# Altium PCB PCB2.PcbDoc
Units mil, origin at the board's own origin, x right, y up, seen from the top; angles counter-clockwise.
Board outline 3188.98 x 3188.98 mil, 2 copper layers (Top Layer, Bottom Layer); 36 components, 23 nets, 149 pads, 22 vias.
Unrouted connection lines stored in the file: 5.
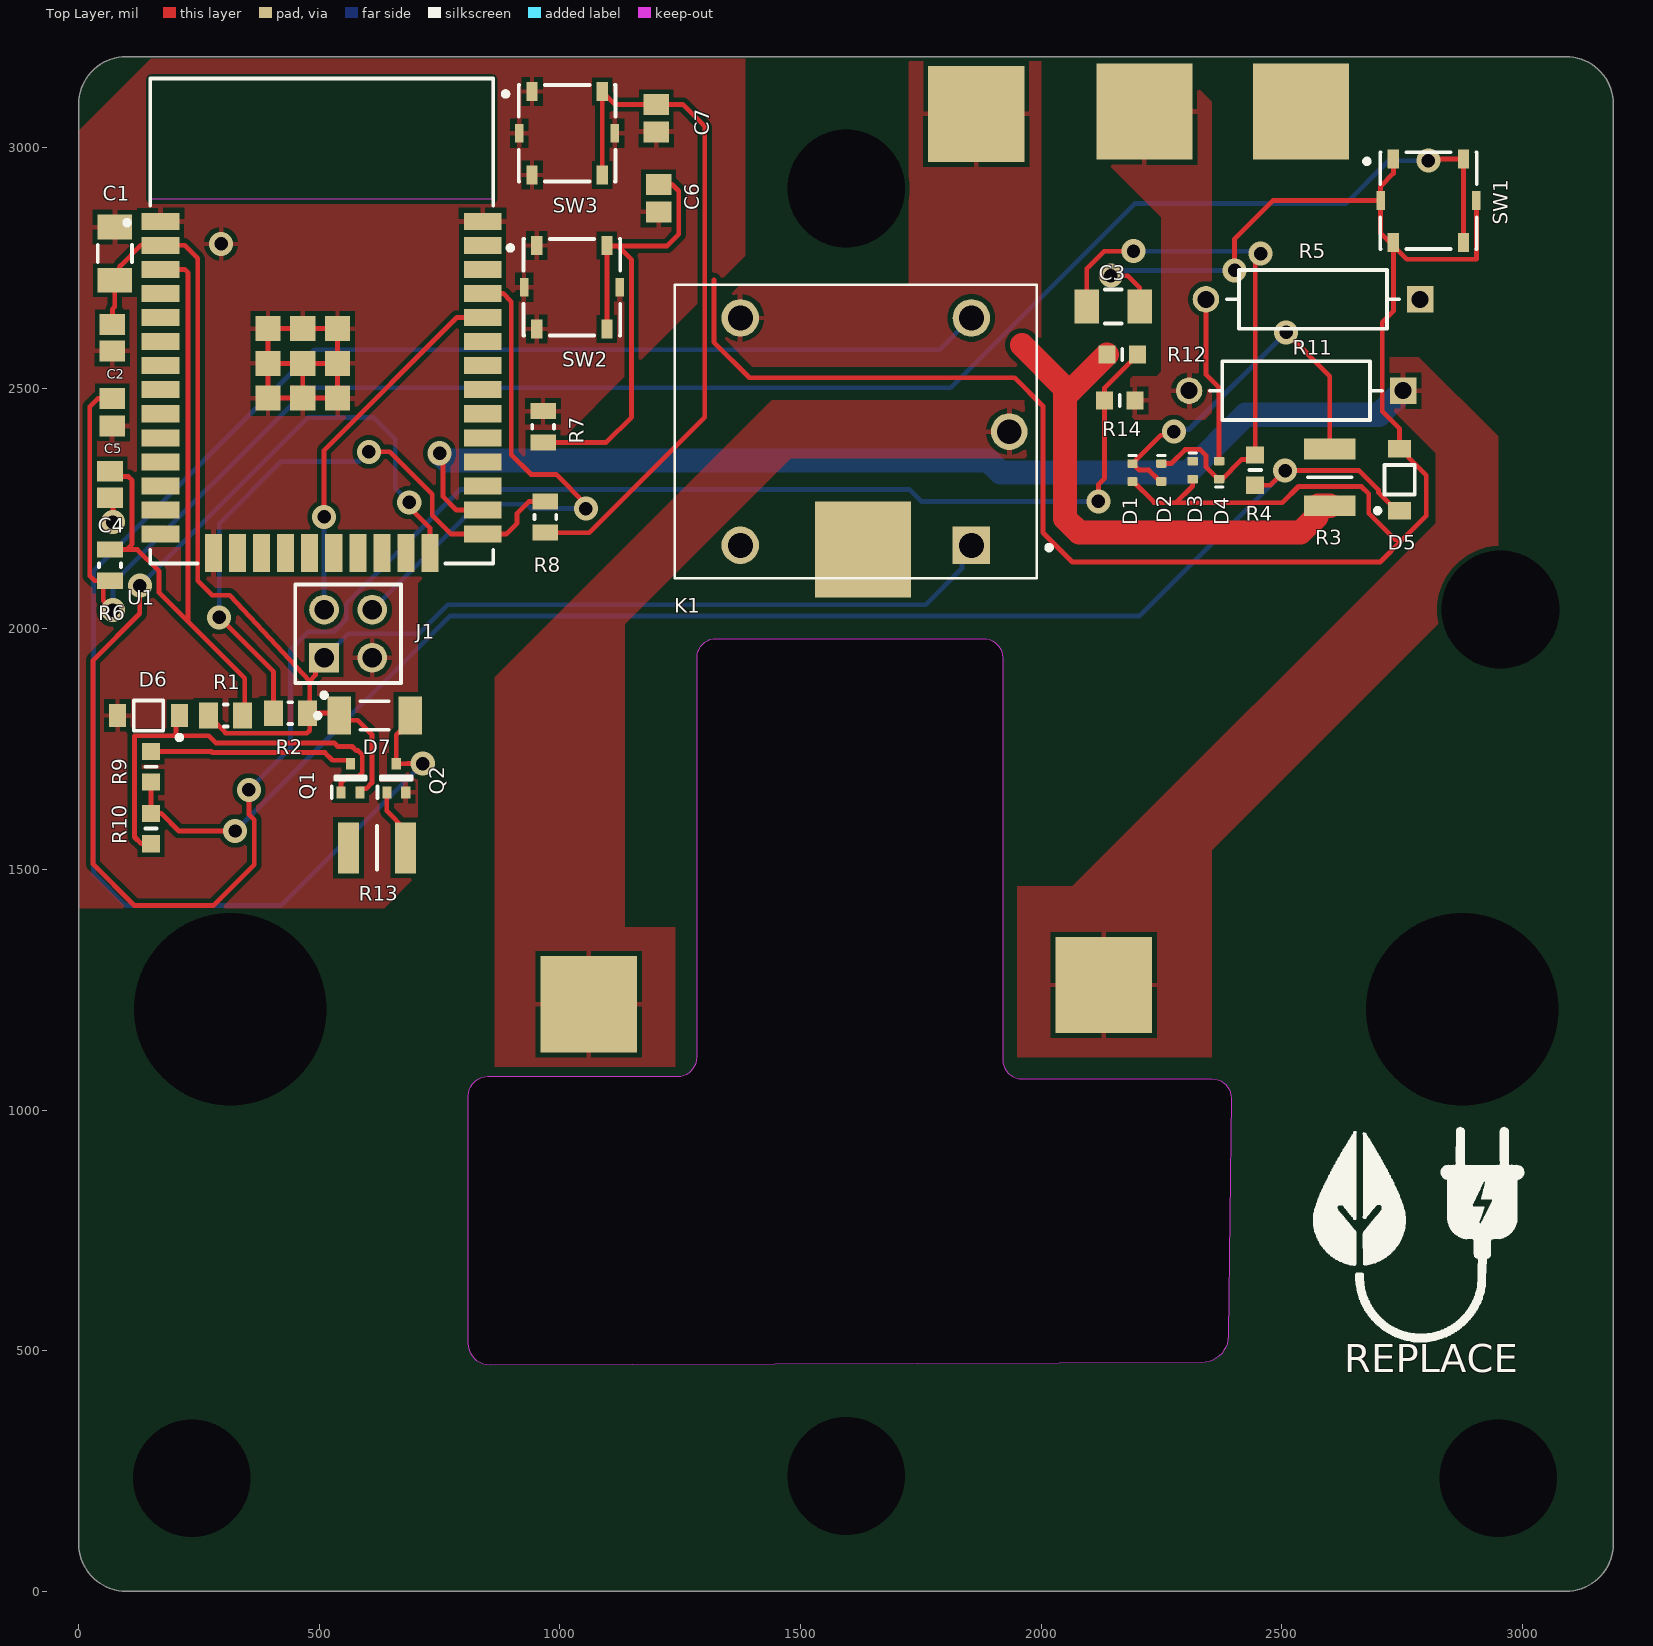
[diagram p0: Top Layer view]
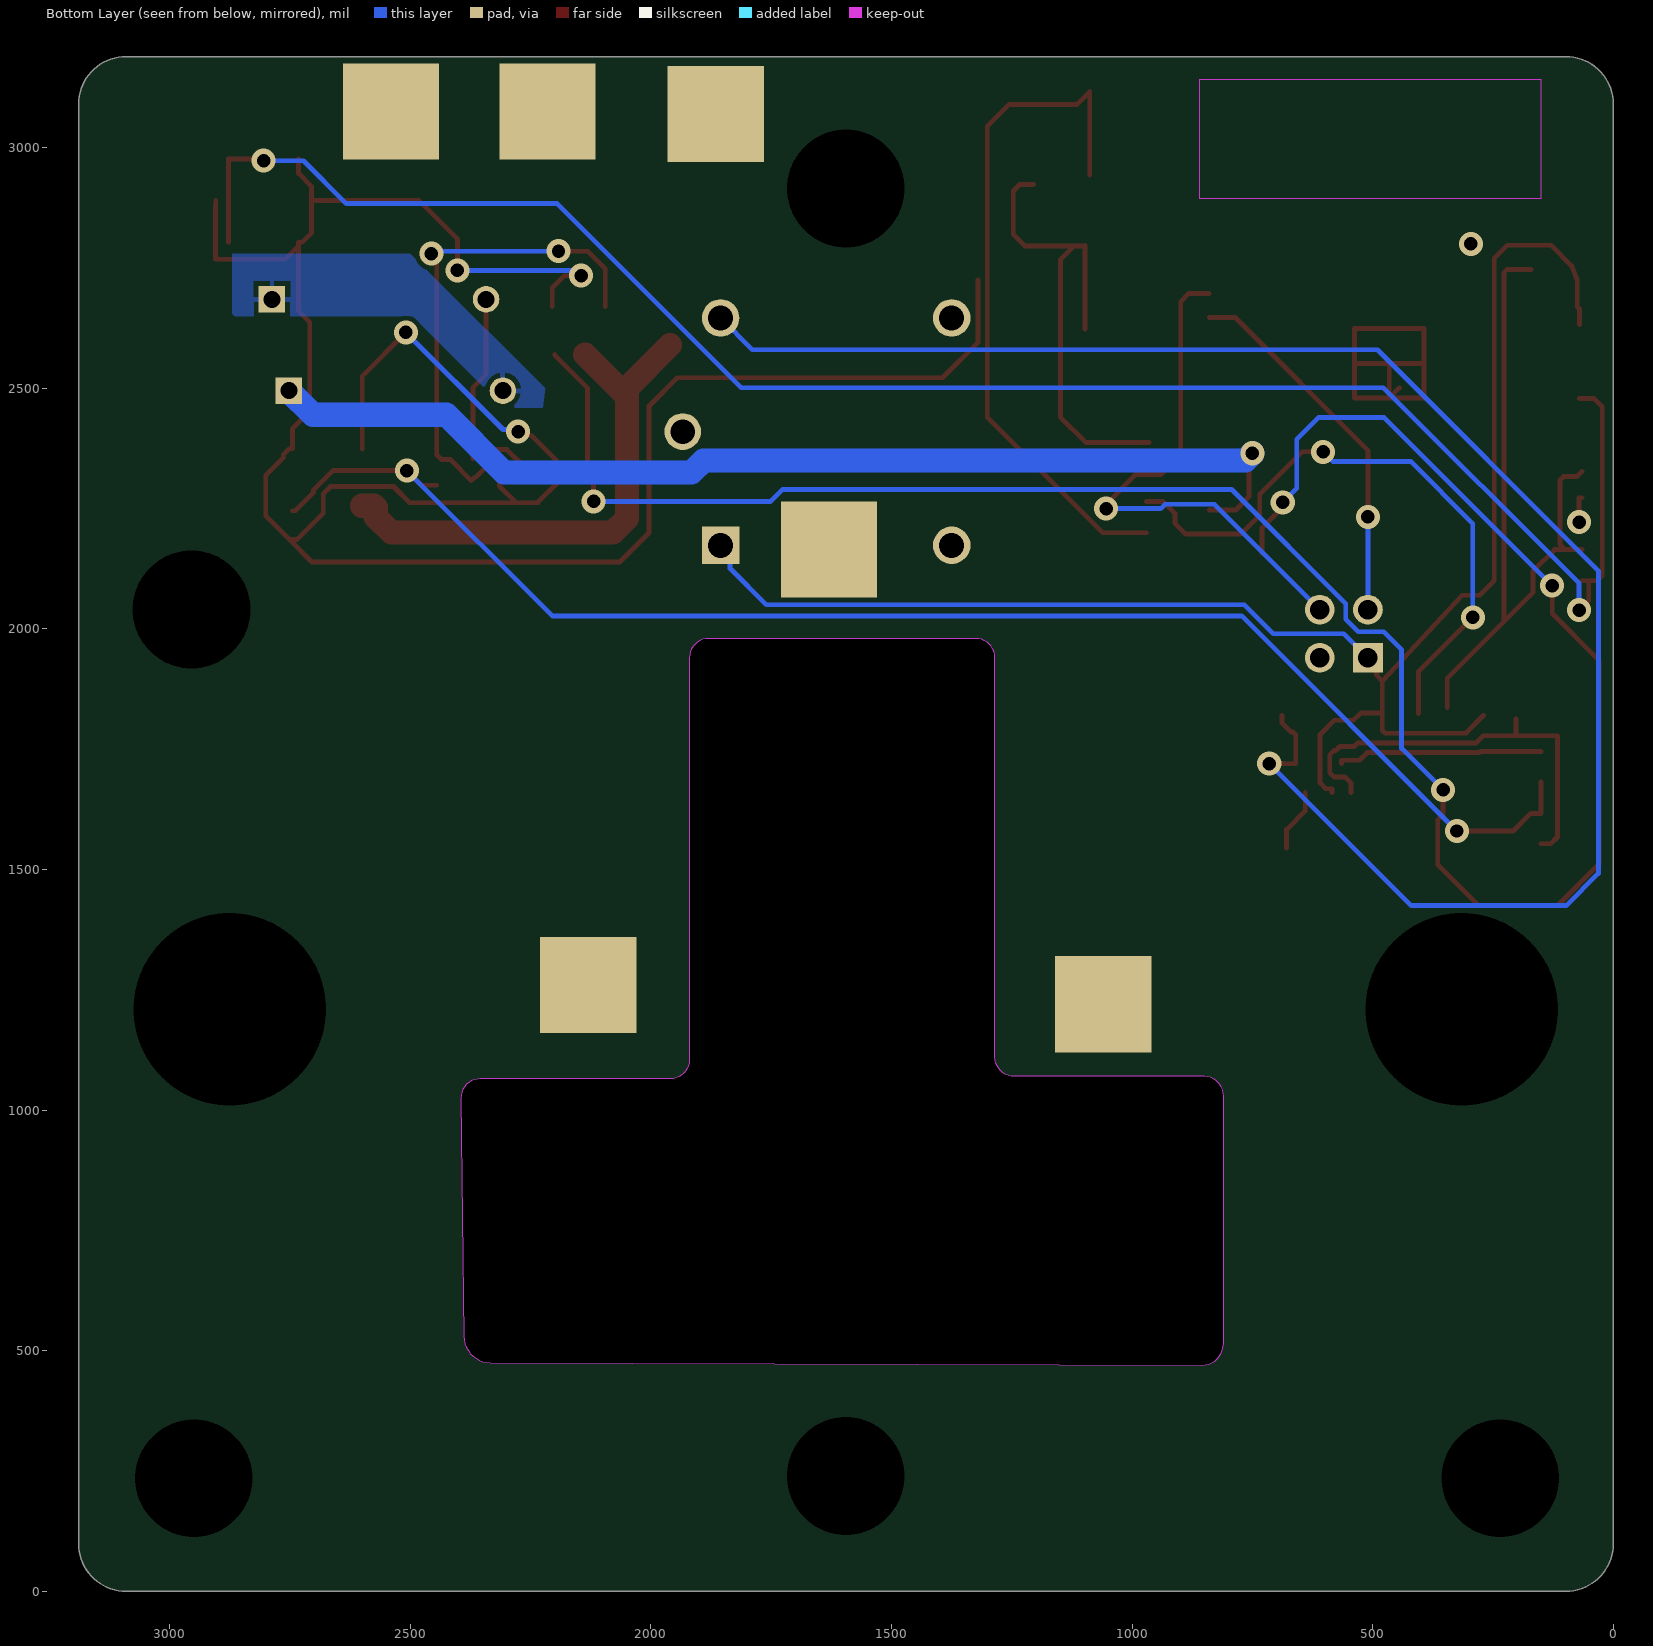
[diagram p1: Bottom Layer view, seen from below]
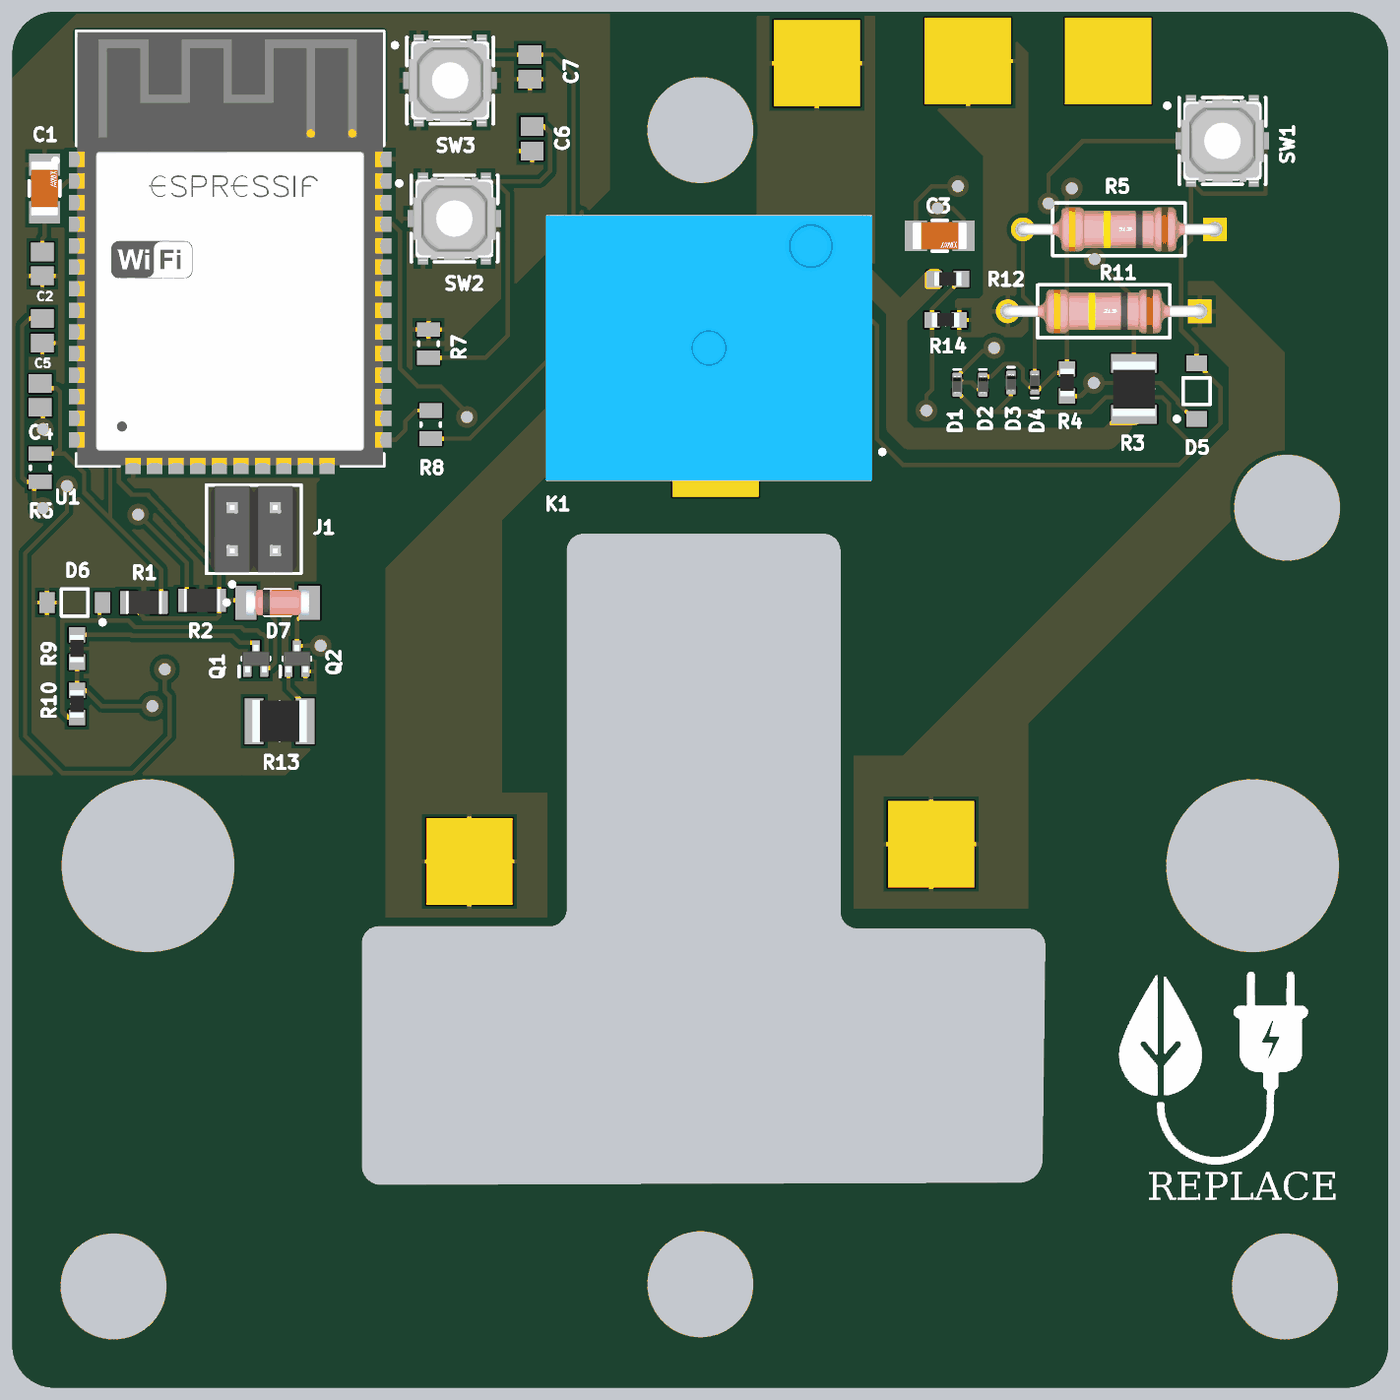
[diagram p2: 3D render of the assembled board from above, using the file's embedded part models]

## Layer stack, top to bottom
Top Solder: solder mask 0.4, Solder Resist, Dk 3.5
Top Layer: signal copper 1.4
Dielectric 1: dielectric 12.6, FR-4, Dk 4.8
Bottom Layer: signal copper 1.4
Bottom Solder: solder mask 0.4, Solder Resist, Dk 3.5

## Board outline
98.68,0.25 cw(c98.68,98.68) 0.25,98.68 0.25,3090.8 cw(c98.68,3090.8) 98.68,3189.23 3090.8,3189.23 cw(c3090.8,3090.8) 3189.23,3090.8 3189.23,98.68 cw(c3090.8,98.68) 3090.8,0.25
cut-out: 810,515 810,1030 cw(c850,1030) 850,1070 1245,1070 ccw(c1245,1110) 1285,1110 1285,1940 cw(c1325,1940) 1325,1980 1880,1980 cw(c1880,1940) 1920,1940 1920,1105 ccw(c1960,1105) 1960,1065 2355,1065 cw(c2355,1025) 2395,1025 2388.68,530.34 cw(c2333.45,530.34) 2333.45,475.1 855,470 cw(c855,515)

## Design rules (kind name [scope] priority, off if disabled: settings)
Clearance [All] p1: gap=10 ignorepadtopadclearanceinfootprint=FALSE except(0: Arc-Hole Track-Hole SMDPad-Hole THPad-Hole Via-Hole Fill-Hole Poly-Hole Region-Hole Text-Hole)
PolygonConnect [All] p1: connectstyle=Relief reliefconductorwidth=10 reliefentries=4 polygonreliefangle="90 Angle" airgapwidth=10
RoutingVias [All] p1: holewidth=28 width=50 viastyle="Through Hole" minholewidth=28 minwidth=50 maxholewidth=28 maxwidth=50
SolderMaskExpansion [All] p1: expansion=4 istentingtop=FALSE
Width [All] p1: maxlimit=100 minlimit=10 preferedwidth=10
30 further rules are at their usual default settings.

## Components (designator, comment, footprint, x,y, rotation, side; value= is the part's Value field where it differs from the comment)
C1 "1206YD106KAT2A" FP-1206-L_3_2_0_2-W_1_6_0-IPC_B 75,2779.85 r90 top
C2 "08055F104KAT2A" CAPC2013X140X50LL20T25 70,2605 r90 top value=100nF
C3 "1206YD106KAT2A" FP-1206-L_3_2_0_2-W_1_6_0-IPC_B 2149.85,2670 r0 top
C4 "C0805C105K4PACTU" CAPC2013X145X50LL20T25 65,2300 r90 top
C5 "VJ0805D102KXAAJ" CAPC2013X145X48LL20T23 70,2450 r90 top
C6 "VJ0805D102KXAAJ" CAPC2013X145X48LL20T23 1205,2895 r90 top
C7 "VJ0805D102KXAAJ" CAPC2013X145X48LL20T23 1200,3061.46 r90 top
D1 "1SS400CSFH" ROHM-VMN2-2_V 2190,2325 r270 top
D2 "1SS400CSFH" ROHM-VMN2-2_V 2250,2325 r270 top
D3 "1SS400CSFH" ROHM-VMN2-2_V 2315,2330 r270 top
D4 "1SS400CSFH" ROHM-VMN2-2_V 2370,2330 r90 top
D5 "MMSZ4691T1G" ONSC-SOD-123-2-425-04_V 2745,2310 r90 top
D6 "MMSZ4691T1G" ONSC-SOD-123-2-425-04_V 145,1820 r180 top
D7 "LL4148-GS18" SOD-80 615,1820 r0 top
J1 "PEC02DABN" FP-PEC02DABN-MFG 560,1990 r0 top
K1 "SRD-05VDC-SL-C" RELAY_SRD-05VDC-SL-C 1615,2410 r180 top
Q1 "MMBT2222AT" SOTFL50P160X78-3N 565,1690 r90 top
Q2 "MMBT2222AT" SOTFL50P160X78-3N 660,1690 r90 top
R1 "RC0805FR-0710KL" RESC2013X60X35NL10T20 305.43,1820 r180 top
R2 "RC0805FR-0710KL" RESC2013X60X35NL10T20 440,1825 r180 top
R3 "CRCW1210120RFKEAHP" RESC3225X70N 2600,2315 r90 top
R4 "0603WAF5101T5E" RESC1608X55N 2445,2330 r90 top
R5 "RR01J100KTB" FP-RR01-MFG 2565,2685 r180 top
R6 "CRCW0805470RFKEA" RESC2013X50X30LL20T20 65,2132.48 r90 top
R7 "CRCW0805470RFKEA" RESC2013X50X30LL20T20 965,2420 r90 top
R8 "CRCW0805470RFKEA" RESC2013X50X30LL20T20 970,2232.48 r90 top
R9 "0603WAF5101T5E" RESC1608X55N 150,1713.5 r90 top
R10 "0603WAF5101T5E" RESC1608X55N 150,1585 r270 top
R11 "RR01J100KTB" FP-RR01-MFG 2530,2495 r180 top
R12 "0603WAF5101T5E" RESC1608X55N 2168.5,2570 r180 top
R13 "CRCW1210120RFKEAHP" RESC3225X70N 620,1545 r0 top
R14 "0603WAF5101T5E" RESC1608X55N 2163.5,2475 r180 top
SW1 "EVQ-PLMA15" FP-EVQ-PLMA15-MFG 2805,2890 r0 top
SW2 "EVQ-PLMA15" FP-EVQ-PLMA15-MFG 1025,2710 r0 top
SW3 "EVQ-PLMA15" FP-EVQ-PLMA15-MFG 1015,3030 r0 top
U1 "ESP32-WROOM-32D" FP-ESP32-WROOM-32D-MFG 505,2640 r0 top

## Footprints (in the part's own frame and the unit in brackets; to place one, negate y for a bottom-side part, rotate by r counter-clockwise, add the part's x,y. Pads: shape width x height; smd on the part's side, far side on the other; paste and mask are expansions set on the pad)
CAPC2013X140X50LL20T25 [mm] "Chip Capacitor, 2-Leads, Body 2.00x1.25mm, IPC High Density"
  rect 1.1x1.35 smd: 1(-0.7,0) 2(0.7,0)
  body extent -1.1,-0.72 1.1,0.72, height 1.4
CAPC2013X145X48LL20T23 [mm] "Chip Capacitor, 2-Leads, Body 2.00x1.25mm, IPC High Density"
  rect 1.1x1.35 smd: 1(-0.725,0) 2(0.725,0)
  body extent -1.1,-0.72 1.1,0.72, height 1.45
CAPC2013X145X50LL20T25 [mm] "Chip Capacitor, 2-Leads, Body 2.00x1.25mm, IPC High Density"
  rect 1.1x1.35 smd: 1(-0.7,0) 2(0.7,0)
  body extent -1.1,-0.72 1.1,0.72, height 1.45
FP-1206-L_3_2_0_2-W_1_6_0-IPC_B [mil]
  rect 51.36x71.11 smd paste+0 mask+0: 1(-55.15,0) 2(55.15,0)
  silkscreen extent -18,-36 18,36, body extent -91,-45 91,45, height 10
FP-ESP32-WROOM-32D-MFG [mm]
  rect 2x0.9 smd paste+0 mask+0: 1(-8.5,5.26) 2(-8.5,3.99) 3(-8.5,2.72) 4(-8.5,1.45) 5(-8.5,0.18) 6(-8.5,-1.09) 7(-8.5,-2.36) 8(-8.5,-3.63) 9(-8.5,-4.9) 10(-8.5,-6.17) 11(-8.5,-7.44) 12(-8.5,-8.71) 13(-8.5,-9.98) 14(-8.5,-11.25) 25(8.5,-11.25) 26(8.5,-9.98) 27(8.5,-8.71) 28(8.5,-7.44) 29(8.5,-6.17) 30(8.5,-4.9) 31(8.5,-3.63) 32(8.5,-2.36) 33(8.5,-1.09) 34(8.5,0.18) 35(8.5,1.45) 36(8.5,2.72) 37(8.5,3.99) 38(8.5,5.26)
  rect 0.9x2 smd paste+0 mask+0: 15(-5.715,-12.25) 16(-4.445,-12.25) 17(-3.175,-12.25) 18(-1.905,-12.25) 19(-0.635,-12.25) 20(0.635,-12.25) 21(1.905,-12.25) 22(3.175,-12.25) 23(4.445,-12.25) 24(5.715,-12.25)
  rect 1.33x1.33 smd paste+0 mask+0: 39(-2.835,-4.075) 39(-2.835,-2.24) 39(-2.835,-0.405) 39(-1,-4.075) 39(-1,-2.24) 39(-1,-0.405) 39(0.835,-4.075) 39(0.835,-2.24) 39(0.835,-0.405)
  Keep-Out Layer region: -9,6.45 9,6.45 9,12.75 -9,12.75
  Keep-Out Layer region: -9,6.45 9,6.45 9,12.75 -9,12.75
  silkscreen extent -10.4,-12.8 9.05,12.8, body extent -9.6,-13.35 9.6,12.9, height 0.25
FP-EVQ-PLMA15-MFG [mm]
  rect 0.45x1 smd paste+0 mask+0: 1(-2.525,0) 2(2.525,0)
  rect 0.6x1 smd paste+0 mask+0: A(-1.85,2.2) A'(-1.85,-2.2) B(1.85,2.2) B'(1.85,-2.2)
  silkscreen extent -3.37,-2.55 2.55,2.55, body extent -2.85,-2.8 2.85,2.8, height 0.25
FP-PEC02DABN-MFG [mm]
  rect 1.57x1.57 hole 1.02 paste-1000 mask+0: 1(-1.27,-1.27)
  round 1.57 hole 1.02 paste-1000 mask+0: 2(-1.27,1.27) 3(1.27,-1.27) 4(1.27,1.27)
  silkscreen extent -2.8,-3.37 2.8,2.61, body extent -2.9,-2.71 2.9,2.71, height 0.25
FP-RR01-MFG [mm]
  rect 1.4x1.4 hole 0.9 paste-1000 mask+0: 1(-5.65,0)
  round 1.4 hole 0.9 paste-1000 mask+0: 2(5.65,0)
  silkscreen extent -4.55,-1.55 4.55,1.55, body extent -6.45,-1.65 6.45,1.65, height 0.25
ONSC-SOD-123-2-425-04_V [mm] "SOD, 2-Leads, Body 2.69x1.6mm"
  rect 0.91x1.22 smd: 1(-1.635,0) 2(1.635,0)
  silkscreen extent -1.76,-0.8 0.78,1.28, body extent -1.35,-0.8 1.35,0.8, height 1.35
RELAY_SRD-05VDC-SL-C [mm]
  rect 1.98x1.98 / inner round 1.98 / far side rect 1.98x1.98 hole 1.32: A1(-6.1,6)
  round 1.98 hole 1.32: A2(-6.1,-6) NC(6.1,6) NO(6.1,-6)
  round 1.935 hole 1.29: COM(-8.1,0)
  silkscreen extent -10.3,-7.75 9.55,7.75, body extent -9.6,-7.8 9.6,7.8, height 15.8
RESC1608X55N [mm]
  rect 0.9x0.95 smd: 1(-0.8,0) 2(0.8,0)
  silkscreen extent 0,-0.3 0,0.3, body extent -0.8,-0.4 0.8,0.4, height 0.55
RESC2013X50X30LL20T20 [mm] "Chip Resistor, 2-Leads, Body 2.00x1.25mm, IPC High Density"
  rect 0.85x1.35 smd: 1(-0.825,0) 2(0.825,0)
  silkscreen extent -0.1,-0.58 0.1,0.58, body extent -1.1,-0.72 1.1,0.72, height 0.5
RESC2013X60X35NL10T20 [mm] "Chip Resistor, 2-Leads, Body 2.1x1.35mm, IPC Medium Density"
  rect 1x1.35 smd: 1(-0.9,0) 2(0.9,0)
  silkscreen extent -0.1,-0.58 0.1,0.58, body extent -1.05,-0.68 1.05,0.67, height 0.6
RESC3225X70N [mm]
  rect 1.1x2.7 smd: 1(-1.5,0) 2(1.5,0)
  silkscreen extent 0,-1.15 0,1.15, body extent -1.6,-1.25 1.6,1.25, height 0.7
ROHM-VMN2-2_V [mm] "VMN2, 2-Leads, Body 0.9x0.6mm, Pitch 0.95mm"
  rrect25% 0.45x0.55 smd: 1(-0.475,0) 2(0.475,0)
  silkscreen extent -0.9,-0.2 -0.9,0.2, body extent -0.5,-0.3 0.5,0.3, height 0.37
SOD-80 [mm]
  rect 1.25x2 smd: 1(-1.875,0) 2(1.875,0)
  silkscreen extent -3.12,-0.75 0.75,0.75, body extent -1.85,-0.78 1.85,0.78, height 1.6
SOTFL50P160X78-3N [mm]
  rect 0.63x0.48 smd: 1(-0.755,0.5) 2(-0.755,-0.5) 3(0.755,0)
  silkscreen extent -1.07,-0.8 0.09,0.99, body extent -0.8,-0.8 0.8,0.8, height 0.78

## Part data
C1 C3: library part CMP-04427-000082-1, "General Purpose Ceramic Capacitor, 1206, 10uF, 10%, X5R, 15%, 16V", Capacitance=10uF, Case Code (Imperial)=1206, Case Code (Metric)=3216, Dielectric=X5R, Max Operating Temperature=85°C, Min Operating Temperature=-55°C, Package Quantity=1, Tolerance=10%, Voltage=16V, Case/Package=1206, Construction=Flat, Depth=1.6mm, Height=0.07mm, Lead Free="Lead Free", Length=3.2mm, Mount="Surface Mount", Number of Pins=2, Packaging="Tape and Reel", Radiation Hardening=No, REACH SVHC="No SVHC", RoHS Compliant=Yes, Series=-, Size=1.78mm, Termination=SMD/SMT, Thickness=0.07inch, Voltage Rating=16V, Voltage Rating (DC)=16V, Width=1.6mm
C2: library part CMP-2007-04784-1, Manufacturer="AVX Interconnect / Elco", Part Number=08055F104KAT2A
C4: library part CMP-1036-04746-2, Manufacturer=Kemet, Parameter 1=1uF, Part Number=C0805C105K4PACTU
C5 C6 C7: library part CMP-2007-03135-1, Manufacturer=Vitramon, Parameter 1=1nF, Part Number=VJ0805D102KXAAJ
D1 D2 D3 D4: library part CMP-004-00022-3, "Switching Diode (High Speed Switching), 80 V, 100 mA, 2-Pin SOD-923, RoHS, Tape and Reel", Mounting Technology=SMT, Pins=2
D5 D6: library part CMP-1060-00606-1, "Zener Voltage Regulator, 500 mW, 2-Pin SOD-123, Pb-Free, Tape and Reel", Manufacturer="On Semiconductor", ComponentLink1Description="Manufacturer URL", ComponentLink1URL=http://www.onsemi.com/, ComponentLink2Description=Datasheet, ComponentLink2URL=http://www.onsemi.com/pub_link/Collateral/MMSZ4678T1-D.PDF, ComponentLink3Description="Package Specification", ComponentLink3URL=http://www.onsemi.com/pub_link/Collateral/425-04.PDF, DatasheetVersion="Rev. 9", Mounting Technology="Surface Mount", P Max (W)=0.5, PackageDescription="2-Pin SOD, Body 1.6 x 2.69 mm", PackageReference=SOD-123-2-425-04, PackageVersion="Rev. G, 10/2009", Packing="Tape and Reel", PartNumber=MMSZ4691T1G, RoHS=Pb-Free, VZ Typ (V)=6.2
D7: "Diode", Manufacturer_Name=Vishay, Mouser Part Number=78-LL4148-GS18, Arrow Part Number=LL4148-GS18, Arrow Price/Stock=https://www.arrow.com/en/products/ll4148-gs18/vishay?region=europe, Datasheet Link=https://www.vishay.com/docs/85557/ll4148.pdf, Manufacturer_Part_Number=LL4148-GS18, Mouser Price/Stock=https://www.mouser.co.uk/ProductDetail/Vishay-Semiconductors/LL4148-GS18?qs=YkIJFe%252BtFEUsKqcD4T1jvg%3D%3D
J1: library part CMP-25680-000069-1, "CONN HEADER VERT 4POS 2.54MM", Color=Black, Flammability Rating="UL94 V-0", Max Operating Temperature=125°C, Min Operating Temperature=-65°C, Package Quantity=1, Connector Type="Male Pin", Contact Finish - Mating=TIN, Contact Material=Bronze, Contact Mating Length=0.23inch, Contact Plating=Tin, Contact Shape=Square, Contact Type="Male Pin", Fastening Type=Pull, Gender=Male, Height=2.54mm, Housing Color=Black, Housing Material=Plastic, Insulation Color=Black, Insulation Material=PBT, Lead Free="Lead Free", Length=5.08mm, Mount="Through Hole", Number of Contacts=4, Number of Positions=4, Number of Rows=2, Packaging=Bulk, Pitch=0.1inch, RoHS Compliant=Yes, Row Spacing=0.1inch, Series=-, Termination=Solder, Width=5.08mm
K1: "5V Trigger Relay Module For Arduino And Raspberry Pi 5V Trigger Relay Module For Arduino And Raspberry Pi", Package="NON STANDARD-5 Songle Relay", Availability="Not in stock", Check_prices=https://www.snapeda.com/parts/SRD-05VDC-SL-C/Songle+Relay/view-part/?ref=eda, MF="Songle Relay", MP=SRD-05VDC-SL-C, Price=None, SnapEDA_Link=https://www.snapeda.com/parts/SRD-05VDC-SL-C/Songle+Relay/view-part/?ref=snap
Q1 Q2: "Transistor BJT NPN", Manufacturer_Name=onsemi, Mouser Part Number=512-MMBT2222AT, Arrow Part Number=MMBT2222AT, Arrow Price/Stock=https://www.arrow.com/en/products/mmbt2222at/on-semiconductor, Datasheet Link=http://www.onsemi.com/pub/Collateral/MMBT2222ATT1-D.PDF, Height=0.78mm, Manufacturer_Part_Number=MMBT2222AT, Mouser Price/Stock=https://www.mouser.co.uk/ProductDetail/ON-Semiconductor-Fairchild/MMBT2222AT/?qs=olBtUnqRSekpPcGAXqyohQ%3D%3D
R1 R2: library part CMP-1659-00013-4, "Chip Resistor, 10 KOhm, +/- 1%, 0.125 W, -55 to 155 degC, 0805 (2012 Metric), RoHS, Tape and Reel", Manufacturer=Yageo, Max Operating Temperature="155 degC", Min Operating Temperature="-55 degC", Package Quantity=5000, Voltage Rating="150 V", ComponentLink1Description="Manufacturer URL", ComponentLink1URL=http://www.yageo.com/, ComponentLink2Description=Datasheet, ComponentLink2URL=http://www.yageo.com/documents/recent/PYu-RC_Group_51_RoHS_L_04.pdf, DatasheetVersion="Rev. 4, 02/2016", Height="0.5 mm", Length="2 mm", Mount="Surface Mount", Mounting Technology="Surface Mount", PackageDescription="2-Pin Surface Mounted Device, Body 2 x 1.25 mm", PackageReference=0805, Packaging="Tape and Reel", Parameter 1=10k, Pins=2, REACH SVHC="No SVHC", RoHSCompliant=true
R3 R13: "Resistor", Manufacturer_Name=Vishay, Mouser Part Number=71-CRCW1210120RFKEAH, Arrow Part Number=CRCW1210120RFKEAHP, Arrow Price/Stock=https://www.arrow.com/en/products/crcw1210120rfkeahp/vishay?region=nac, Datasheet Link=http://componentsearchengine.com/Datasheets/1/CRCW1210120RFKEAHP.pdf, Height=0.7mm, Manufacturer_Part_Number=CRCW1210120RFKEAHP, Mouser Price/Stock=https://www.mouser.co.uk/ProductDetail/Vishay-Dale/CRCW1210120RFKEAHP?qs=OAzHGkhREL38%2FX7kAmU4KQ%3D%3D
R4 R9 R10 R12 R14: "Resistor", Manufacturer_Name="UNI-ROYAL(Uniroyal Elec)", Datasheet Link=https://datasheet.lcsc.com/szlcsc/Uniroyal-Elec-0603WAF5101T5E_C23186.pdf, Height=0.55mm, Manufacturer_Part_Number=0603WAF5101T5E
R5 R11: library part CMP-03212-000008-1, "RES 100K OHM 5% 1W AXIAL", Case/Package=Metal, Max Operating Temperature=155°C, Min Operating Temperature=-55°C, Number of Resistors=1, Package Quantity=5000, Power Rating=1W, Resistance=100kR, Resistor Type="Power resistor", Temperature Coefficient=300ppm/°C, Tolerance=5%, Voltage Rating=350V, Diameter=2.6mm, ELV=Compliant, Length=6.8mm, Mount=Axial, Number of Terminations=2, Packaging="Ammo Pack", RoHS Compliant=Yes, Series=RR, Termination=Axial
R6 R7 R8: library part CMP-2001-03932-1, Manufacturer="Vishay Dale", Parameter 1="470 ohm", Part Number=CRCW0805470RFKEA
SW1 SW2 SW3: library part CMP-05618-000006-1, "SWITCH TACTILE SPST-NO 0.02A 15V", Contact Current Rating=20mA, Contact Resistance=50mΩ, Manufacturer="Panasonic Electronic Components", Operating Force=2.6N, Package=0, Temperature="-20°C to +70°C", Temperature Range High=+70°C, Temperature Range Low=-20°C, Voltage Rating Dc=15V, Automotive=No, Category=Switch, ComponentLink2Description=Datasheet, ComponentLink2URL=https://datasheet.ciiva.com/8164/atv0000ce2-8164994.pdf, Device Class L1=Electromechanical, Device Class L2=Switches, Device Class L3="Tactile Switches", Digikey Description="SWITCH TACTILE SPST-NO 0.02A 15V", Electromechanical Life=200000Cycles, Height=1.7mm, Lead Free=Yes, Manufacturer Part Number=EVQ-PLMA15, Mount="Surface Mount", Mouser Description="Tactile Switches FLAT ACT 2.6NF 4.6x3.4x1.5mm", Octopart=https://octopart.com/evq-plma15-panasonic-39850235, RoHS=TRUE, Throw Configuration=SPST-NO
U1: library part CMP-194065-000003-1, "WIFI MODULE 32MBITS SPI FLASH", Manufacturer="Espressif Systems", Max Frequency=2484MHz, Max Supply Voltage=3.6V, Min Supply Voltage=3V, Nominal Supply Current=500mA, Temperature="-40°C to +85°C", Temperature Range High=+85°C, Temperature Range Low=-40°C, Automotive=No, Bandwidth=72MHz, Category=UNK, ComponentLink2Description=Datasheet, ComponentLink2URL=https://www.espressif.com/sites/default/files/documentation/esp32-wroom-32d_esp32-wroom-32u_datasheet_en.pdf, Data Rate=150Mbits/s, Device Class L1="Integrated Circuits (ICs)", Device Class L2="RF Semiconductors and Devices", Device Class L3=Transceivers, Digikey Description="WIFI MODULE 32MBITS SPI FLASH", Height=3.2mm, Interface=I2C,SPI,UART,Ethernet,I2S,Other, Lead Free=Yes, Manufacturer Part Number=ESP32-WROOM-32D, Mouser Description="Wi-Fi/BT BLE Module ESP32-D0WD, SPI Flash, UART, P", Number Of Adc Channels=16, Number Of Gpio=32, Octopart=https://octopart.com/esp32-wroom-32d-espressif+systems-91040050, Package=ESP32-WROOM-32D, RoHS=TRUE, Sensitivity=-98dBm

## Free pads (board coordinates)
  round 60 hole 245: 10(235,235) 10(1595,240) 10(2950,235) 10(2955,2040) 11(1595,2915)
  round 60 hole 400: 10(2875,1210)
  oval 390x60 hole 400: 12(315,1210)
  rect 200x200 all layers, no hole: 17(1060,1220) 18(2130,1260) 19(1630,2165) 20(1865,3070) 21(2215,3075) 22(2540,3075)

## Via types
v1: diameter 50, hole 28, Top Layer to Bottom Layer, tented both sides, 22 vias

## Nets (pads, with @x,y where several pads share a name; then routed paths per layer and width w, separated by ;. In a path a pad name is that pad's centre, name@x,y a point inside that pad or via, vN(x,y) a via of type N, cw(c..) or ccw(c..) an arc to the next point about the centre after c; other vN are vias at no path point)
3V3: C1.1 C2.2 D7.1 J1.1 K1.A1 Q1.2 R1.2 R2.1 U1.2 | length 3445.8
  Top Layer w10: C2.2 70,2664.02 75,2669.02 C1.1 86,2754 129.09,2797.09 U1.2 220,2797.09 247.28,2769.8 247.28,2100 277.28,2070 314,2070 480,1891.59 ; R1.2 304.57,1785.43 304.57,1783 474.14,1783 480,1788.86 R2.1@480,1825 ; J1.1 492.06,1922.06 492.06,1903.65 480,1891.59 ; Q1.2 584.69,1667.68 597.13,1667.68 609.45,1680 609.45,1780.55 580,1810 540,1810 525,1825 R2.1@480,1825 ; R2.1@480,1825 480,1891.59
  Bottom Layer w10: J1.1 560,1990 706.72,1990 766.72,2050 1760,2050 1835.66,2125.66 1835.66,2154.28 K1.A1
+6.2V: D5.1 R4.1 R9.1 R10.1 | length 3098.2
  Top Layer w10: R9.1 R10.1 171.5,1616.5 208,1580 v1(325,1580) ; R4.1 2476.5,2298.5 v1(2507,2329) 2660.88,2329 2701,2288.88 2701,2283.53 2738.9,2245.63 D5.1
  Bottom Layer w10: v1(325,1580) 772,2027 2205,2027 v1(2507,2329)
BOOT: R2.2 R8.2 U1.25 | length 1318
  Top Layer w10: v1(292,2024) 405,1911 R2.2@405,1823.55 ; v1(603.09,2368) 646.6,2368 734.6,2280 734.6,2236.49 774,2197.09 U1.25 888.09,2197.09 911,2220 911,2240 935.96,2264.96 R8.2
  Bottom Layer w10: v1(292,2024) 292,2218.88 421.13,2348 583.09,2348 v1(603.09,2368)
D4: R13.1
EN: C4.2 R1.1 R6.2 U1.3 | length 1465
  Top Layer w10: R6.2 100,2164.96 ; C4.2 76,2316.56 103.44,2316.56 111,2309 111,2175.96 100,2164.96 ; U1.3 220,2747.09 227.28,2739.8 227.28,2014.72 ; R1.1@345,1836.57 345,1897 227.28,2014.72 ; 100,2164.96 122.04,2164.96 167,2120 167,2075.43 227.28,2014.72
GND: C1.2 C2.1 C3.2 C4.1 C5.1 C6.1 C7.1 D1.2 D3.2 D5.2 D6.2 J1.3 Q2.2 R7.2 SW1.1 SW1.2 SW1.A SW1.A' SW2.1 SW2.2 SW2.A SW2.A' SW3.1 SW3.2 SW3.A SW3.A' U1.1 U1.15 U1.38 U1.39 | length 5499.7
  Top Layer w10: C4.1 71,2272.44 v1(71,2222) ; U1.39@444.45,2500.75 U1.39@465.63,2479.57 ; 1320,2725 1320,2596 1394,2522 1945,2522 2004,2463 2004,2200 2065,2139 2704.43,2139 2751.43,2186 ; v1(2145,2734) 2180,2734 2205,2709 C3.2 ; D1.2 2191.97,2306.3 2234.3,2263.97 2234.3,2262 2280,2262 ; D3.2 2315,2297 2280,2262 ; v1(2402,2745) 2402,2810.48 2481.52,2890 SW1.1 ; 2705.59,2822.41 2724.61,2803.39 SW1.A' SW1.A'@2732.17,2795.83 ; 2705.59,2823.41 SW1.1 ; SW1.A 2732.17,2946.58 2705.59,2920 SW1.1 ; SW1.2 2904.41,2879 2905,2879 2905,2768 2760,2768 SW1.A'@2732.17,2795.83 ; U1.39@393.39,2551.81 393.39,2479.57 U1.39@465.63,2479.57 ; U1.39@393.39,2551.81 393.39,2624.06 465.63,2624.06 537.87,2624.06 U1.39@537.87,2551.81 ; U1.39@393.39,2551.81 U1.39@465.63,2551.81 ; U1.39@465.63,2479.57 U1.39@465.63,2551.81 ; U1.39@465.63,2479.57 537.87,2479.57 U1.39@537.87,2551.81 ; U1.39@465.63,2551.81 U1.39@537.87,2551.81 ; 2280,2262 2501,2262 2534.94,2295.94 2665.65,2295.94 2681,2280.6 2681,2240 2735,2186 2751.43,2186 ; SW1.A'@2732.17,2795.83 2732.17,2660 2709,2636.83 2709,2452 2745,2416 D5.2 2751.1,2374.37 2764.02,2361.46 2764.02,2355.35 2800.36,2319.01 2800.36,2234.93 2751.43,2186
  Bottom Layer w10: v1(2145,2734) 2156,2745 v1(2402,2745)
  other v1: 296,2800
I_in: pad.18 R11.1 U1.26 | length 2276.5
  Top Layer w10: v1(750,2365) 757.4,2357.6 757.4,2274.69 785,2247.09 U1.26
  Bottom Layer w50: v1(750,2365) 764.73,2350.27 1890.27,2350.27 1915.53,2325 2305,2325 2425,2445 2702.44,2445 R11.1
L: K1.NO pad.20 R3.1 R12.2 | length 1118
  Top Layer w50: 1960,2590 2050,2500 2050,2482.99 ; R12.2 2050,2482.99 ; R3.1 2575.2,2255.94 2571.85,2252.6 2571.85,2232.64 2539.21,2200 2079.29,2200 2050,2229.29 2050,2482.99
L_plug: K1.COM pad.17
N: pad.21 R5.1 R11.2 R14.1
NetC3_1: C3.1 D2.1 D4.1 R4.2 | length 1145.6
  Top Layer w10: C3.1 2094.7,2748.7 2131,2785 v1(2192,2785) ; D2.1 2270.4,2343.7 2299.26,2372.56 2330.74,2372.56 2342.5,2360.8 2342.5,2336.6 2363.94,2315.16 2366.14,2315.16 D4.1 ; D4.1@2373.15,2308.15 2417.16,2352.16 2435.66,2352.16 R4.2 2445,2769 v1(2456,2780)
  Bottom Layer w10: v1(2192,2785) 2451,2785 v1(2456,2780)
NetC5_2: C5.2 R6.1 SW1.B SW1.B' | length 3922.2
  Top Layer w10: R6.1 R6.1@51,2100 ; C5.2 39.54,2478.54 23,2462 23,2110 33,2100 R6.1@51,2100 ; v1(71,2039) 51,2059 R6.1@51,2100 ; v1(2805,2973) 2808.61,2976.61 SW1.B SW1.B'
  Bottom Layer w10: v1(71,2039) 71,2094.41 477.91,2501.32 1812.32,2501.32 2194.98,2883.98 2632.98,2883.98 2722,2973 v1(2805,2973)
NetC7_2: C7.2 R8.1 SW3.B SW3.B' | length 1450.5
  Top Layer w10: R8.1 1060.57,2200 1300.86,2440.3 1300.86,3044.14 1255,3090 C7.2 1114.45,3090 SW3.B SW3.B'
NetD1_1: D1.1 D2.2 R3.2 | length 789.2
  Top Layer w10: D2.2 2246.14,2310.16 2243.94,2310.16 2223.94,2330.16 2203.54,2330.16 2195.83,2337.87 2195.83,2339.84 D1.1@2191.97,2343.7 ; v1(2275.81,2410) 2268.16,2402.35 2248.65,2402.35 2195.83,2349.53 2195.83,2347.56 D1.1@2191.97,2343.7 ; v1(2509,2616) 2600,2525 R3.2 ; D1.1@2191.97,2343.7 D1.1 D1.1@2191.97,2343.7
  Bottom Layer w10: v1(2275.81,2410) 2280.22,2414.41 2307.41,2414.41 v1(2509,2616)
NetD3_1: D3.1 D4.2 R5.2 | length 342.7
  Top Layer w10: R5.2 2342.56,2528.89 2370,2501.45 D4.2@2370,2353.7
NetD6_1: D6.1 Q1.1 R10.2 | length 884.8
  Top Layer w10: R10.2 130,1553.5 116,1567.5 116,1778 202.19,1778 ; D6.1@202.19,1812.82 202.19,1778 ; Q1.1 545.32,1680 557.32,1692 580.34,1692 589.45,1701.11 589.45,1738.34 580.79,1747 576.63,1747 568,1755.63 538.37,1755.63 531,1763 285,1763 270,1778 202.19,1778
NetD7_2: D7.2 K1.A2 Q2.3 | length 3673.9
  Top Layer w10: D7.2 688.82,1805.24 669.21,1785.63 665.86,1785.63 660,1779.77 Q2.3 682.72,1719.72 683,1720 v1(715,1720)
  Bottom Layer w10: v1(715,1720) 420,1425 98,1425 31,1492 31,2121 490,2580 1788.94,2580 K1.A2
NetQ1_3: Q1.3 R9.2 | length 429.8
  Top Layer w10: R9.2 276,1745 278,1743 511.57,1743 527.45,1727.13 565,1727.13 Q1.3
NetQ2_1: Q2.1 R13.2 | length 131.3
  Top Layer w10: Q2.1 640.32,1621.74 679.06,1583 R13.2
RX_ESP: J1.2 U1.34 | length 775
  Top Layer w10: v1(510,2233) 510,2371 786.09,2647.09 U1.34
  Bottom Layer w10: J1.2 v1(510,2233)
Switch: C6.2 R7.1 SW2.B SW2.B' | length 1043.7
  Top Layer w10: R7.1 1096.52,2387.52 1149,2440 1149,2767 1120,2796 ; SW2.B' SW2.B@1097.83,2796 ; SW2.B SW2.B@1097.83,2796 ; C6.2 1233.46,2923.54 1247,2910 1247,2820 1223,2796 1120,2796 ; SW2.B@1097.83,2796 1120,2796
TX_ESP: J1.4 U1.35 | length 1129.5
  Top Layer w10: U1.35 881.91,2697.09 899,2680 899,2362 940,2321 992,2321 1054,2259 v1(1054,2250)
  Bottom Layer w10: J1.4 829,2259 931.59,2259 940.59,2250 v1(1054,2250)
Vin: R12.1 R14.2 U1.24 | length 4657.3
  Top Layer w10: v1(127,2090) 127,2032 30,1935 30,1511 116,1425 280,1425 365,1510 365,1603.3 353.72,1614.59 v1(353.72,1665.28) ; v1(687,2263) 687,2253 730,2210 U1.24 ; v1(2119,2265) 2119,2300 2132.01,2313.01 R14.2 2132.01,2501 2200,2568.99 R12.1
  Bottom Layer w10: v1(127,2090) 476,2439 612.73,2439 658,2393.73 658,2292 v1(687,2263) ; v1(353.72,1665.28) 440,1751.57 440,1956.72 477.28,1994 530,1994 556,2020 556,2052.55 793.45,2290 1726.21,2290 1751.21,2265 v1(2119,2265)
pads on no net: K1.NC U1.4 U1.5 U1.6 U1.7 U1.8 U1.9 U1.10 U1.11 U1.12 U1.13 U1.14 U1.16 U1.17 U1.18 U1.19 U1.20 U1.21 U1.22 U1.23 U1.27 U1.28 U1.29 U1.30 U1.31 U1.32 U1.33 U1.36 U1.37

## Polygon pours and split planes (outlines as drawn)
N on Top Layer "NONET_L-01_P-001" (solid, pour order 6): 2077.5,3027.5 2250,2855 2250,2535 2240,2525 2190,2525 2185,2520 2185,2445 2195,2435 2340,2435 2355,2450 2355,2595 2355,3095 2250,3200
L on Top Layer "NONET_L-01_P-001" (solid, pour order 1): 1375,2715 1340,2680 1340,2605 1400,2545 1990,2545 2000,2535 2000,3180 1730,3180 1725,3185 1725,2715
I_in on Top Layer "NONET_L-01_P-001" (solid, pour order 3): 2725,2460 2725,2565 2785,2565 2950,2400 2950,2135 2355,1540 2355,1110 1950,1110 1950,1465 2065,1465 2820,2220 2820,2365 2730,2455 2730,2475
L_plug on Top Layer "NONET_L-01_P-001" (solid, pour order 4): 1970,2355 1480,2355 1135,2010 1135,1380 1240,1380 1240,1090 865,1090 865,1900 1440,2475 1965,2475
GND on Top Layer "NONET_L-01_P-001" (solid, pour order 0): -0.09,1420 635,1420 705,1490 705,2095 1385,2775 1385,3185 150,3185 -0.09,3034.91
N on Bottom Layer "NONET_L-01_P-001" (solid, pour order 2): 2225,2460 2335,2460 2335,2490 2495,2650 2865,2650 2870,2655 2870,2780 2500,2780 2220,2500

## Silkscreen, mask and mechanical layers (free items; w line width, h text height)
Top Overlay:
  drawing of 3 lines, arcs and shapes, not listed
  text "REPLACE" at 2630.09,435.83 h100
Mechanical 1:
  drawing of 183 lines, arcs and shapes, not listed